# EAGLE board Cinesense (EAGLE 9.3.1)
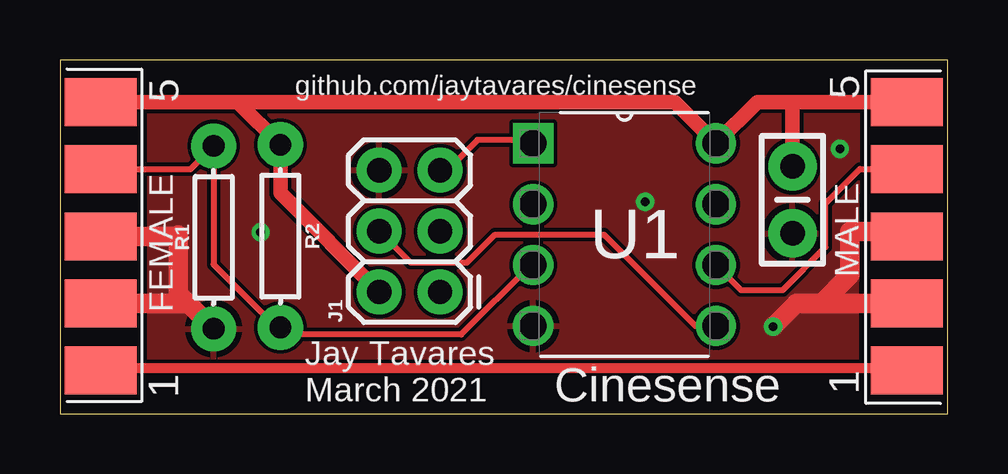
[diagram p0: board, top side]
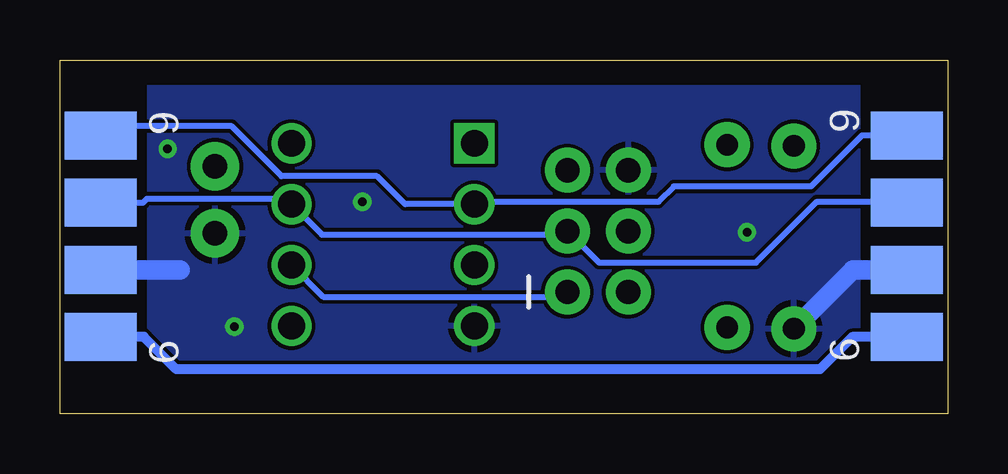
[diagram p1: board, bottom side, seen from below]

Size 37 x 14.75 mm. Coordinates in mm from the lower left corner, seen from the top.
Outline: 0,0 37,0 37,14.75 0,14.75 0,0
Copper layers (1*16): Top 0.035mm / dielectric 1.5mm / Bottom 0.035mm
Design rules "default": minimum track width 6mil, minimum drill 0.35mm, track to track 6mil, track to pad 6mil, pad to pad 6mil, via to via 6mil, smd to smd 6mil, copper to edge 40mil, drill to drill 6mil, minimum pad ring 10mil, minimum via ring 8mil, stop-mask expansion 4mil, vias tented up to drill 0mil, thermal gap 10mil

## Footprints (pad centres in the part's own frame; a part is rotated, then mirrored left to right if it is on the bottom)
CAP-PTH-SMALL-KIT = drill 1.016 pad 2.032: 1 -1.397,0; 2 1.397,0
2X3 = drill 1.016 pad 1.88: 1 0,0; 2 0,2.54; 3 2.54,0; 4 2.54,2.54; 5 5.08,0; 6 5.08,2.54
DE9-EDGE-M = smd 2 x 3: 1 -5.6,0; 2 -2.8,0; 3 0,0; 4 2.8,0; 5 5.6,0 | smd 2 x 3 bottom: 6 -4.2,0; 7 -1.4,0; 8 1.4,0; 9 4.2,0
DE9-EDGE-F = smd 2 x 3: 1 5.6,0; 2 2.8,0; 3 0,0; 4 -2.8,0; 5 -5.6,0 | smd 2 x 3 bottom: 6 4.2,0; 7 1.4,0; 8 -1.4,0; 9 -4.2,0
AXIAL-0.3 = drill 0.9 pad 1.88: P$1 -3.81,0; P$2 3.81,0
DIP254P762X533-8 = drill 1.118 square: 1 -7.62,7.62 | drill 1.118: 2 -7.62,5.08; 3 -7.62,2.54; 4 -7.62,0; 5 0,0; 6 0,2.54; 7 0,5.08; 8 0,7.62

## Placement (x,y rotation side)
C1  0.1uF  [CAP-PTH-SMALL-KIT]  30.54,8.92 90 top
J1  AVR_SPI_PROG_3X2PTH  [2X3]  15.85,5.07 90 top
P1  DE9-PCB-EDGEMALE  [DE9-EDGE-M]  35.3,7.39 90 top
P2  DE9-PCB-EDGEFEMALE  [DE9-EDGE-F]  1.7,7.39 270 top
R1  1M  [AXIAL-0.3]  6.41,7.35 90 top
R2  1M  [AXIAL-0.3]  9.19,7.4 270 top
U1  ATTINY85-20PU  [DIP254P762X533-8]  27.34,3.65 0 top

## Library data of the parts
C1 = SparkFun-Capacitors; PROD_ID: CAP-08370
J1 = SparkFun-Connectors
P1 P2 = WackyJay
R1 R2 = SparkFun-Resistors
U1 = ATTINY85-20PU; AVAILABILITY: Unavailable; DESCRIPTION: ATtiny Series 20 MHz 8 KB Flash 512 B SRAM 8-Bit Microcontroller - DIP-8; MF: Microchip; MP: ATTINY85-20PU; PACKAGE: DIP-8 Microchip; PRICE: None

## Nets
ANALOG_LEFT+: P1.6 P2.6
ANALOG_RIGHT+: P1.1 P2.1
CTRL_IN: P2.4 R1.P$2 R2.P$2 U1.3
CTRL_OUT: J1.1 P1.4 U1.6
GND: C1.1 J1.6 P1.2 P1.3 P1.7 P2.2 P2.3 P2.7 R1.P$1 U1.4
IR: P1.9 P2.9 U1.2
MOSI: J1.4 U1.5
OPTICAL_AUDIO: J1.3 P1.8 P2.8 U1.7
RST: J1.5 U1.1
VCC: C1.2 J1.2 P1.5 P2.5 R2.P$1 U1.8

## Tracks (layer width: path | path; a pad name or v marks a point on that pad's centre or on a via)
ANALOG_LEFT+
  Bottom 0.406: P2.6 3.97,3.19 5.31,1.85 32.15,1.85 33.5,3.2 P1.6
ANALOG_RIGHT+
  Top 0.305: 34.89,1.89 P1.1
  Top 0.406: 34.89,1.89 1.8,1.89 P2.1
CTRL_IN
  Top 0.254: P2.4 5.44,10.19 R1.P$2 6.41,6.22 9.03,3.59 R2.P$2 9.49,3.29 16.72,3.29 19.62,6.19 U1.3
CTRL_OUT
  Top 0.254: U1.6 28.39,5.15 30.13,5.15 31.92,6.94 31.92,8.76 33.35,10.2 P1.4
  Bottom 0.254: J1.1 16.05,4.87 26.02,4.87 U1.6
GND  (via drill 0.35)
  Top 0.813: P2.3 4.89,7.39 4.93,7.44 4.93,5.01 R1.P$1 5.35,4.59 P2.2 | P1.3 35.1,7.6 32.93,7.6 32.93,5.77 31.76,4.6 | P1.2 31.76,4.6 | 31.76,4.6 30.7,4.6 v29.73,3.63
  Bottom 0.813: P2.7 3.95,5.99 R1.P$1 | P1.7 32,6
  other vias: 24.4,8.84 32.52,11.04 8.36,7.57
  pour Top: 3.7,14.7 3.7,0 33.21,0 33.31,14.7
  pour Bottom: 3.7,14.7 3.7,0.1 3.8,0 33.3,0 33.3,14.7
IR
  Bottom 0.254: P2.9 3.57,11.59 5.7,9.47 11.41,9.47 12.05,8.83 19.62,8.83 U1.2 22.61,8.73 23.78,9.9 27.76,9.9 29.84,11.98 34.89,11.98 P1.9
MOSI
  Top 0.254: J1.4 14.62,6.29 16.97,6.29 18.14,7.46 22.69,7.46 26.5,3.65 U1.5
OPTICAL_AUDIO
  Bottom 0.254: P1.8 33.53,8.8 33.37,8.96 27.57,8.96 U1.7 26.08,7.46 15.99,7.46 J1.3 14.53,6.29 7.98,6.29 5.44,8.84 1.78,8.84 P2.8
RST
  Top 0.254: U1.1 19.59,11.41 17.41,11.41 16.15,10.15 J1.5
VCC
  Top 0.61: P2.5 7.41,12.99 | 7.41,12.99 25.62,12.99 U1.8 29.07,13 P1.5 30.54,13 C1.2 | J1.2 9.19,9.19 R2.P$1 7.41,12.99

## Text on the board
tPlace: github.com/jaytavares/cinesense | Jay Tavares / March 2021 | Cinesense